# Allegro board EmberBase.brd
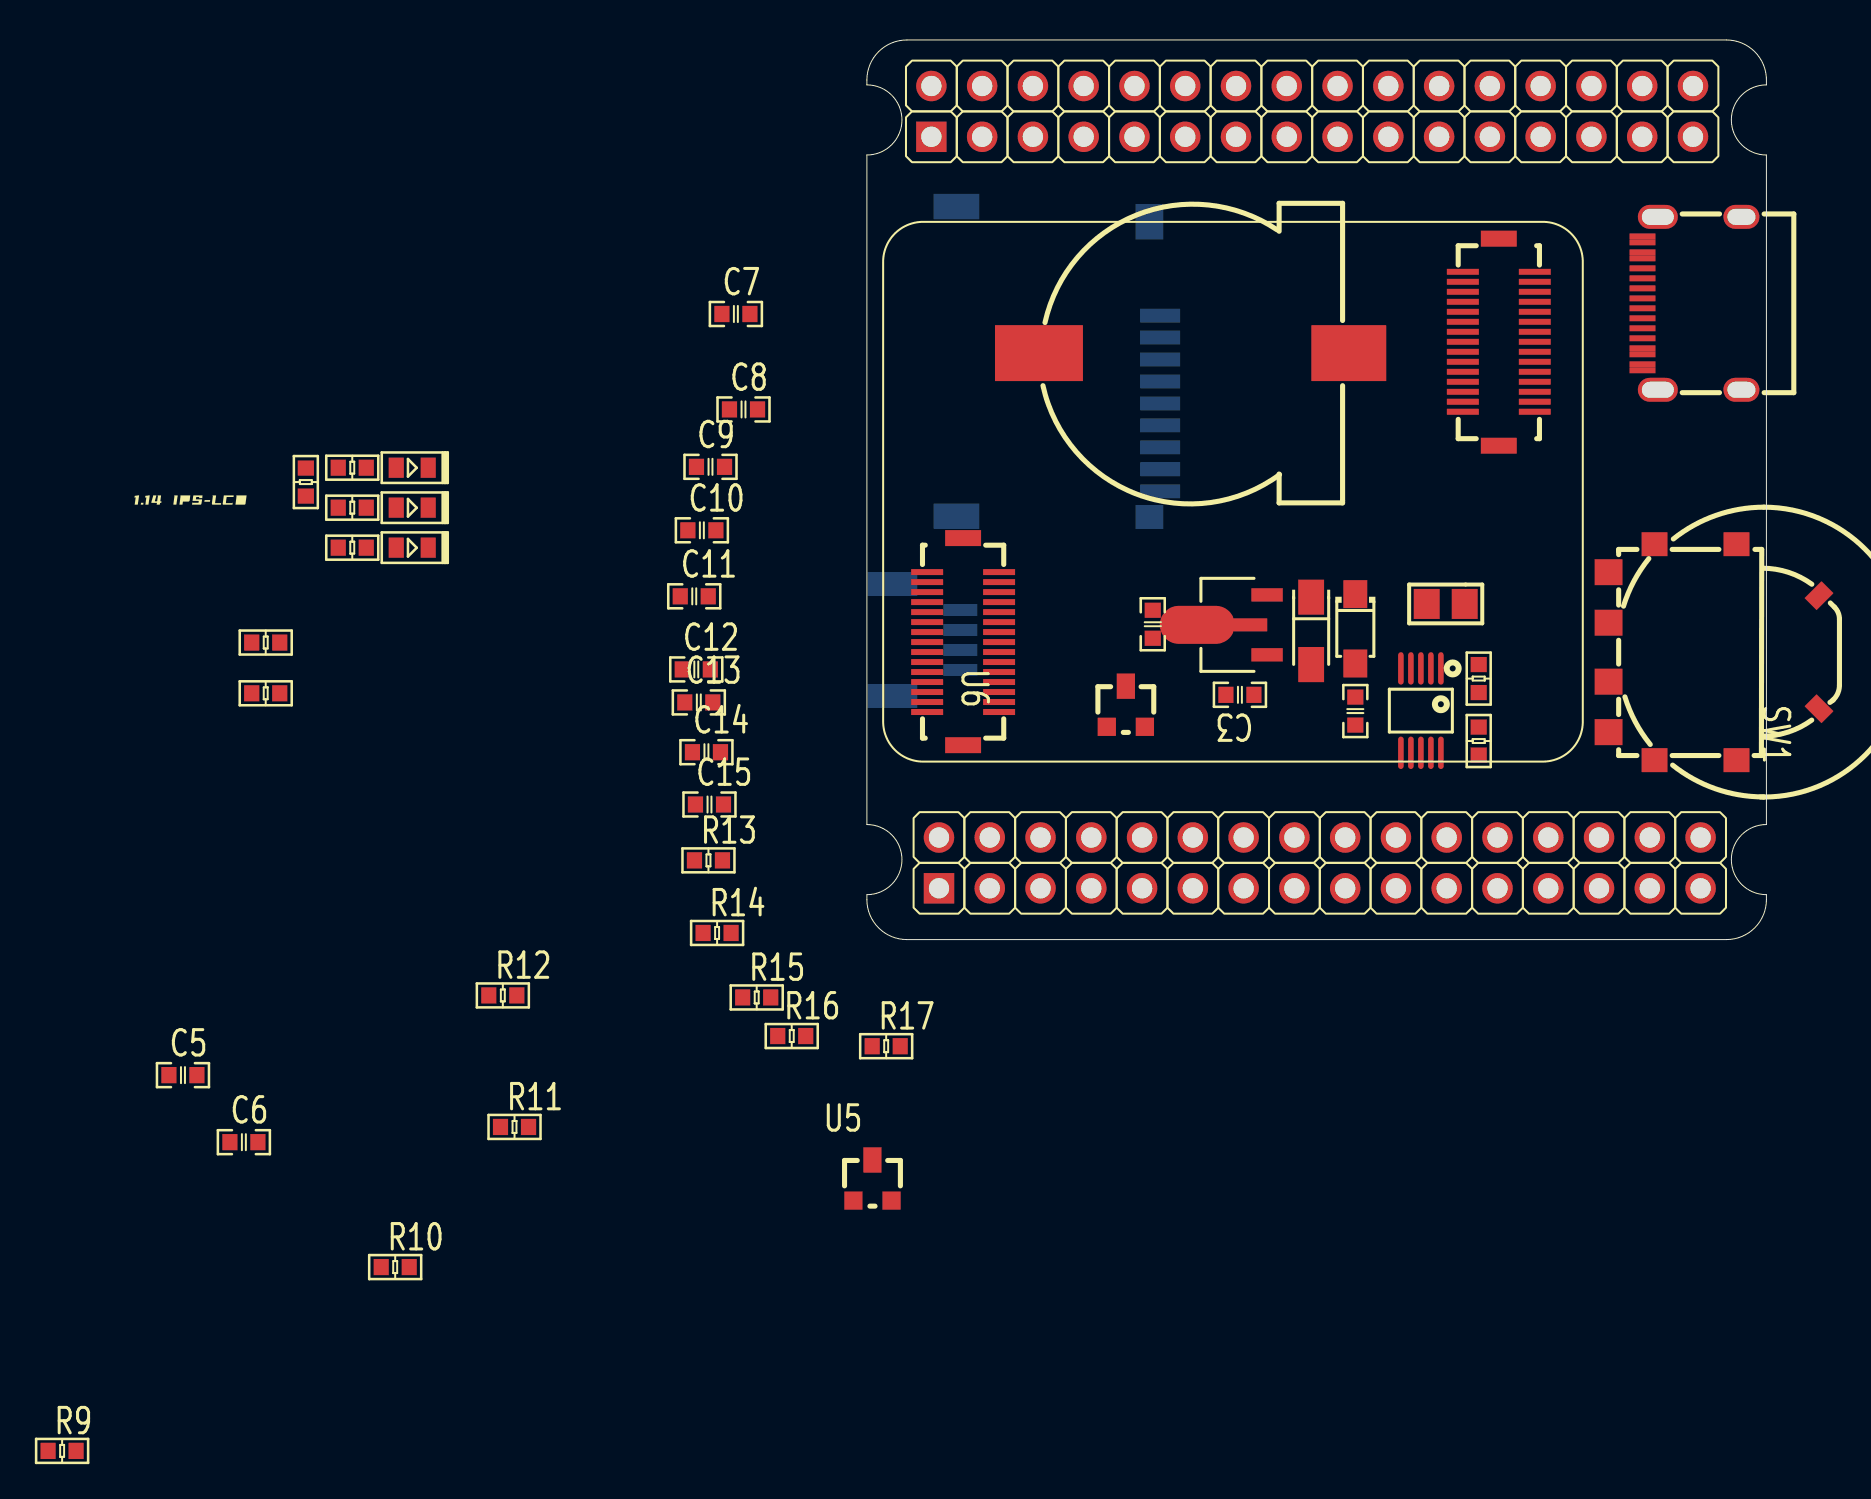
[diagram p0: board, top side]
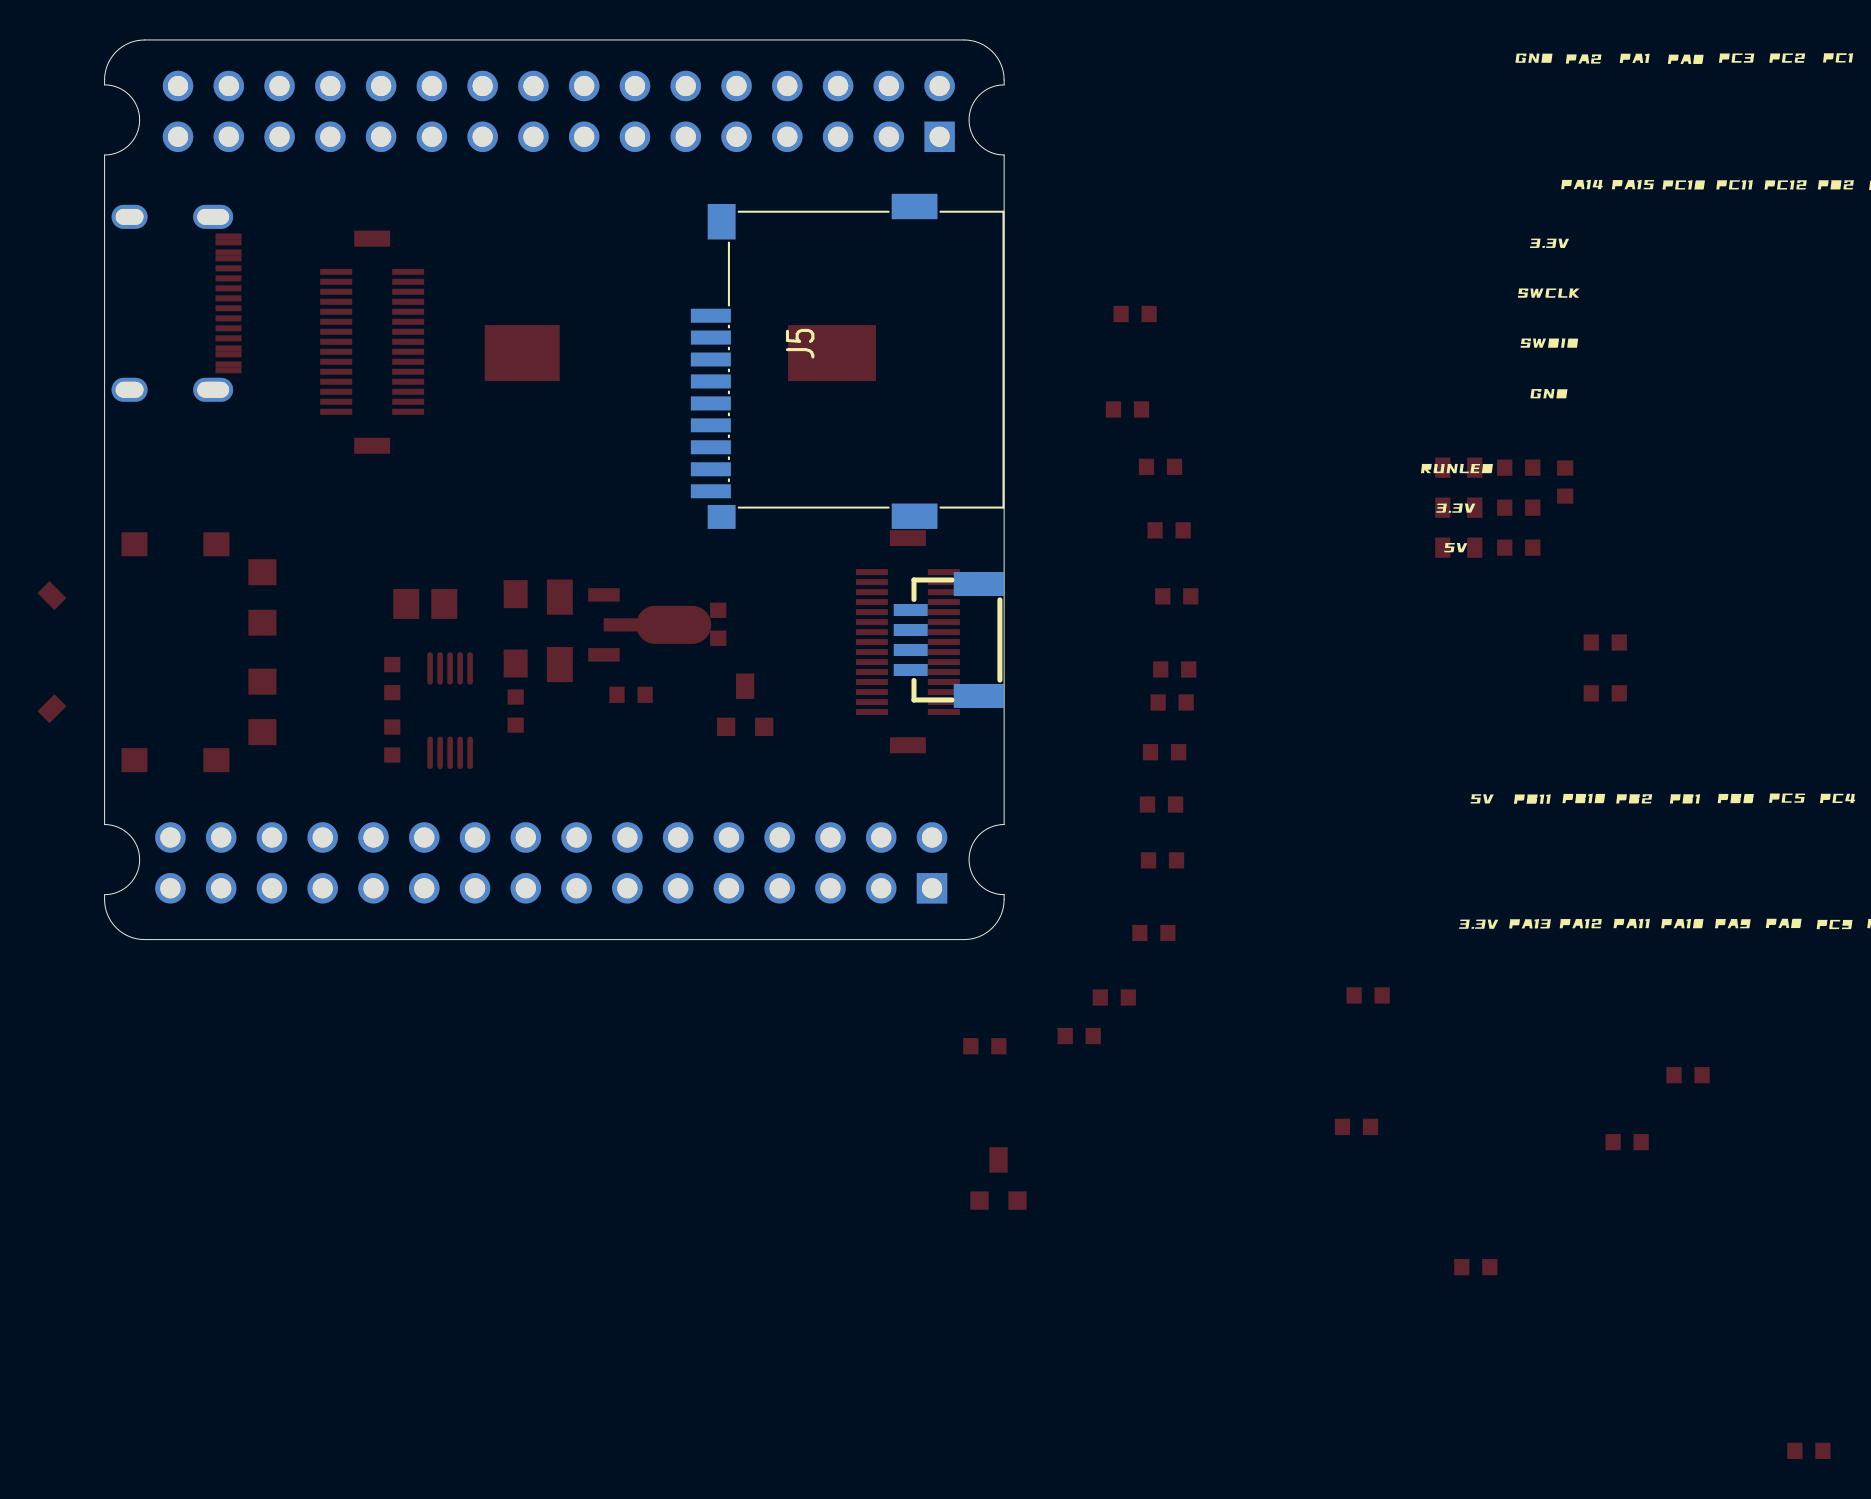
[diagram p1: board, bottom side, seen from below]

Outline 45 x 45 mm; copper layers: TOP, GND, PWR, BOTTOM. Coordinates in mm from the lower left corner of the outline.
Outline path: 0,43 arc(0.59,44.41) 2,45 43,45 arc(44.41,44.41) 45,43 45,42.75 arc(43.25,41) 45,39.25 45,5.75 arc(43.25,4) 45,2.25 45,2 arc(44.41,0.59) 43,0 2,0 arc(0.59,0.59) 0,2 0,2.25 arc(1.75,4) 0,5.75 0,39.25 arc(1.75,41) 0,42.75 0,43

## Design rules (mm)
constraint set DEFAULT: min track width 0.152

## Placement (name value [footprint] x y rotation side)
BT1  CR1220  [CR1220_SMD]  16.36 29.34 0 top
C1  10uF  [C0603]  14.3 15.77 90 top
C2  10uF  [CASE-A-3216]  22.23 15.44 270 top
C3  10uF  [C0603]  18.66 12.24 180 top
C4  0.1uF  [C0603]  24.43 11.43 90 top
C5  10uF  [C0603]  -34.21 -6.78 0 top
C6  10uF  [C0603]  -31.17 -10.13 0 top
C7  0.1uF  [C0603]  -6.55 31.29 0 top
C8  10uF  [C0603]  -6.17 26.52 0 top
C9  0.1uF  [C0603]  -7.82 23.65 0 top
C10  10uF  [C0603]  -8.26 20.47 0 top
C11  0.1uF  [C0603]  -8.64 17.17 0 top
C12  10uF  [C0603]  -8.53 13.51 0 top
C13  0.1uF  [C0603]  -8.41 11.86 0 top
C14  10uF  [C0603]  -8.03 9.37 0 top
C15  0.1uF  [C0603]  -7.87 6.76 0 top
D1  LED  [LED0603]  -22.74 19.6 0 top
D2  LED  [LED0603]  -22.74 21.6 0 top
D3  LED  [LED0603]  -22.74 23.6 0 top
D4  BAT54C,215  [SOT-23]  12.95 11.63 0 top
F1  BSMD0805-100-6V  [F0805]  28.96 16.79 180 top
J1  Type-C 12P  [TYPE-C-12P]  41.27 31.83 90 top
J2  2.54 2X16P  [CON_254-2X16P]  22.66 3.84 0 top
J3  2.54 2X16P  [CON_254-2X16P]  22.28 41.43 0 top
J5  MicroSD  [TFCARD_SMD]  9.58 28.91 90 bottom
J6  SH1.0 4P SMD  [CON_1-4P-SMD]  2.97 14.99 90 bottom
NOREF  -  []  -49.24 5.13 0 top
NOREF#2  -  []  -24.48 27.31 0 top
NOREF#3  -  []  -49.23 2.6 0 top
NOREF#4  -  []  -22.67 21.59 0 top
NOREF#5  -  []  -33.83 21.99 0 top
NOREF#6  -  []  -56.85 42.13 0 top
NOREF#7  -  []  -51.75 39.58 0 top
NOREF#8  -  []  -59.38 39.58 0 top
NOREF#9  -  []  -33.98 5.14 0 top
NOREF#10  -  []  -51.76 42.12 0 top
NOREF#11  -  []  -24.45 32.35 0 top
NOREF#12  -  []  -59.37 42.13 0 top
NOREF#13  -  []  -28.91 2.6 0 top
NOREF#14  -  []  -41.58 42.13 0 top
NOREF#15  -  []  -51.75 5.12 0 top
NOREF#16  -  []  -28.91 5.16 0 top
NOREF#17  -  []  -26.33 5.13 0 top
NOREF#18  -  []  -56.85 2.61 0 top
NOREF#19  -  []  -56.83 5.11 0 top
NOREF#20  -  []  -41.6 39.59 0 top
NOREF#21  -  []  -44.14 2.61 0 top
NOREF#22  -  []  -46.66 42.13 0 top
NOREF#23  -  []  -54.29 42.12 0 top
NOREF#24  -  []  -46.69 5.1 0 top
NOREF#25  -  []  -23.84 5.14 0 top
NOREF#26  -  []  -36.53 39.59 0 top
NOREF#27  -  []  -39.06 2.62 0 top
NOREF#28  -  []  -26.37 42.11 0 top
NOREF#29  -  []  -41.61 2.56 0 top
NOREF#30  -  []  -26.37 2.6 0 top
NOREF#31  -  []  -36.51 5.16 0 top
NOREF#32  -  []  -49.17 39.58 0 top
NOREF#33  -  []  -46.69 39.6 0 top
NOREF#34  -  []  -49.22 42.11 0 top
NOREF#35  -  []  -39.08 5.18 0 top
NOREF#36  -  []  -46.69 2.63 0 top
NOREF#37  -  []  -61.94 39.64 0 top
NOREF#38  -  []  -44.13 42.13 0 top
NOREF#39  -  []  -33.98 39.58 0 top
NOREF#40  -  []  -33.96 42.06 0 top
NOREF#41  -  []  -39.04 42.12 0 top
NOREF#42  -  []  -31.43 5.14 0 top
NOREF#43  -  []  -31.46 2.61 0 top
NOREF#44  -  []  -36.51 42.12 0 top
NOREF#45  -  []  -24.52 34.84 0 top
NOREF#46  -  []  -24.48 29.84 0 top
NOREF#47  -  []  -33.99 2.6 0 top
NOREF#48  -  []  -28.89 39.6 0 top
NOREF#49  -  []  -23.82 2.58 0 top
NOREF#50  -  []  -22.69 23.57 0 top
NOREF#51  -  []  -44.15 39.56 0 top
NOREF#52  -  []  -31.44 39.6 0 top
NOREF#53  -  []  -54.29 5.1 0 top
NOREF#54  -  []  -31.41 42.11 0 top
NOREF#55  -  []  -28.85 42.07 0 top
NOREF#56  -  []  -41.6 5.16 0 top
NOREF#57  -  []  -56.85 39.58 0 top
NOREF#58  -  []  -51.78 2.59 0 top
NOREF#59  -  []  -22.67 19.61 0 top
NOREF#60  -  []  -61.91 42.11 0 top
NOREF#61  -  []  -54.31 2.61 0 top
NOREF#62  -  []  -39.08 39.58 0 top
NOREF#63  -  []  -54.3 39.59 0 top
NOREF#64  -  []  -44.16 5.12 0 top
NOREF#65  -  []  -36.52 2.6 0 top
R1  5.1K  [R0603]  -30.07 12.32 0 top
R2  5.1K  [R0603]  -30.07 14.86 0 top
R3  1K  [R0603]  30.61 13.06 90 top
R4  3K  [R0603]  -25.74 19.6 180 top
R5  3K  [R0603]  -25.74 21.6 180 top
R6  470R  [R0603]  -25.74 23.6 180 top
R7  1K(NC)  [R0603]  30.61 9.93 270 top
R8  0R  [R0603]  -28.07 22.89 90 top
R9  10K  [R0603]  -40.26 -25.58 0 top
R10  10K  [R0603]  -23.6 -16.38 0 top
R11  10K  [R0603]  -17.63 -9.37 0 top
R12  100R  [R0603]  -18.21 -2.79 0 top
R13  10K  [R0603]  -7.92 3.96 0 top
R14  10K  [R0603]  -7.49 0.33 0 top
R15  10K  [R0603]  -5.51 -2.9 0 top
R16  10K  [R0603]  -3.76 -4.83 0 top
R17  10K  [R0603]  0.97 -5.33 0 top
SW1  SIQ-02FVS3  [SW_SIQ]  42.37 14.38 270 top
U1  AMS1117  [SOT-89-3]  18.66 15.74 0 top
U3  CH340X  [MSOP-10]  27.71 11.45 180 top
U5  REF3033AIDBZR  [SOT-23]  0.28 -12.06 0 top
U6  Ember_V1.2  [EMBERV1_1]  18.31 22.4 0 top
Z1  SMF7.0A  [SOD-123FL]  24.43 15.54 270 top

## Library data of the parts
BT1 = BATTERY
C1 C3-C15 = C
C2 = CAP
D1-D3 = LED
D4 = DIODE_Dual1
F1 = FUSE
J1 = TYPE-C_12P_SMD
J2 J3 = CON_2X16
J5 = MicroSD
J6 = CON_6: Tolerance: .TOL; User Part Number: E09J074
R1-R17 = R
SW1 = SW_SIQ
U1 = AMS1117_SOT89
U3 = CH340X
U5 = REF3033AIDBZR
U6 = Ember_V1.2
Z1 = TVSA

## Footprints (pads in the part's own frame, mm; a bottom-side part is the same pattern mirrored in y, then rotated)
C0603
  rect 0.762x0.813 smd: 1(-0.701,0) 2(0.701,0)
CASE-A-3216
  rect 1.758x1.295 smd: 1(-1.687,0) 2(1.687,0)
CON_1-4P-SMD
  rect 0.6x1.7 smd: 1(-1.5,1.7) 2(-0.5,1.7) 3(0.5,1.7) 4(1.5,1.7)
  rect 1.2x2.5 smd: 5(2.8,-1.7) 6(-2.8,-1.7)
CON_254-2X16P
  rect 1.524x1.524 hole 1.016: 1(-19.05,-1.27)
  round 1.524 hole 1.016: 2(-19.05,1.27) 3(-16.51,-1.27) 4(-16.51,1.27) 5(-13.97,-1.27) 6(-13.97,1.27) 7(-11.43,-1.27) 8(-11.43,1.27) 9(-8.89,-1.27) 10(-8.89,1.27) 11(-6.35,-1.27) 12(-6.35,1.27) 13(-3.81,-1.27) 14(-3.81,1.27) 15(-1.27,-1.27) 16(-1.27,1.27) 17(1.27,-1.27) 18(1.27,1.27) 19(3.81,-1.27) 20(3.81,1.27) 21(6.35,-1.27) 22(6.35,1.27) 23(8.89,-1.27) 24(8.89,1.27) 25(11.43,-1.27) 26(11.43,1.27) 27(13.97,-1.27) 28(13.97,1.27) 29(16.51,-1.27) 30(16.51,1.27) 31(19.05,-1.27) 32(19.05,1.27)
CR1220_SMD
  rect 3.749x2.799 smd: 1(7.749,0)
  rect 4.399x2.799 smd: 2(-7.749,0)
EMBERV1_1
  rect 1.6x0.3 smd: 1(-15.3,-4.02) 2(-11.7,-4.02) 3(-15.3,-4.52) 4(-11.7,-4.52) 5(-15.3,-5.02) 6(-11.7,-5.02) 7(-15.3,-5.52) 8(-11.7,-5.52) 9(-15.3,-6.02) 10(-11.7,-6.02) 11(-15.3,-6.52) 12(-11.7,-6.52) 13(-15.3,-7.02) 14(-11.7,-7.02) 15(-15.3,-7.52) 16(-11.7,-7.52) 17(-15.3,-8.02) 18(-11.7,-8.02) 19(-15.3,-8.52) 20(-11.7,-8.52) 21(-15.3,-9.02) 22(-11.7,-9.02) 23(-15.3,-9.52) 24(-11.7,-9.52) 25(-15.3,-10.02) 26(-11.7,-10.02) 27(-15.3,-10.52) 28(-11.7,-10.52) 29(-15.3,-11.02) 30(-11.7,-11.02) 31(15.1,4) 32(11.5,4) 33(15.1,4.5) 34(11.5,4.5) 35(15.1,5) 36(11.5,5) 37(15.1,5.5) 38(11.5,5.5) 39(15.1,6) 40(11.5,6) 41(15.1,6.5) 42(11.5,6.5) 43(15.1,7) 44(11.5,7) 45(15.1,7.5) 46(11.5,7.5) 47(15.1,8) 48(11.5,8) 49(15.1,8.5) 50(11.5,8.5) 51(15.1,9) 52(11.5,9) 53(15.1,9.5) 54(11.5,9.5) 55(15.1,10) 56(11.5,10) 57(15.1,10.5) 58(11.5,10.5) 59(15.1,11) 60(11.5,11)
  rect 1.801x0.8 smd: 61(-13.5,-2.32) 62(-13.5,-12.68) 63(13.3,12.66) 64(13.3,2.3)
F0805
  rect 1.301x1.501 smd: 1(-0.95,0) 2(0.95,0)
LED0603
  rect 0.762x1.016 smd: 1(-0.8,0) 2(0.8,0)
MSOP-10
  oval 0.279x1.62 smd: 1(-1.001,-2.111) 2(-0.5,-2.111) 3(0,-2.111) 4(0.5,-2.111) 5(1.001,-2.111) 6(1.001,2.111) 7(0.5,2.111) 8(0,2.111) 9(-0.5,2.111) 10(-1.001,2.111)
R0603
  rect 0.762x0.813 smd: 1(-0.701,0) 2(0.701,0)
SOD-123FL
  rect 1.399x1.199 smd: 1(1.735,0) 2(-1.735,0)
SOT-23
  rect 0.914x0.914 smd: 1(-0.953,-0.991) 2(0.953,-0.991)
  rect 0.914x1.27 smd: 3(0,1.041)
SOT-89-3
  rect 1.575x0.673 smd: 1(1.356,-1.501) 3(1.356,1.499)
  custom 5.375x1.9 smd: 2(-1.321,0)
SW_SIQ
  rect 1.2x1.3 smd: 1(5.4,-2.964) 2(5.4,1.136) 5(-5.4,1.136) 6(-5.4,-2.964)
  rect 0.85x1.2 smd rot 135: 3(2.828,5.264)
  rect 0.85x1.2 smd rot 45: 4(-2.828,5.264)
  rect 1.3x1.4 smd: A(-4,-5.264) B(4,-5.264) C(1.475,-5.264) S(-1.475,-5.264)
TFCARD_SMD
  rect 0.7x2 smd: 1(2.303,5.095) 2(1.21,5.093) 3(0.113,5.095) 4(-0.986,5.095) 5(-2.085,5.095) 6(-3.183,5.095) 7(-4.28,5.095) 8(-5.378,5.095) 9(-6.482,5.095)
  rect 1.2x1.397 smd: 10(-7.765,4.557)
  rect 1.27x2.286 smd: 11(-7.729,-5.095) 12(7.765,-5.095)
  rect 1.778x1.397 smd: 13(7.003,4.557)
TYPE-C-12P
  rect 0.3x1.301 smd: A1(-3.35,2.474) A4(-2.55,2.474) A5(-1.25,2.474) A6(-0.249,2.474) A7(0.249,2.474) A8(1.25,2.474) A9(2.55,2.474) A12(3.35,2.474) B1(3.05,2.474) B4(2.25,2.474) B5(1.75,2.474) B6(0.749,2.474) B7(-0.749,2.474) B8(-1.75,2.474) B9(-2.25,2.474) B12(-3.05,2.474)
  oval 1.199x1.999 hole 0.8x1.6: G1(-4.326,1.707) G2(4.326,1.707)
  oval 1.199x1.801 hole 0.8x1.399: G3(-4.326,-2.474) G4(4.326,-2.474)

## Nets
5V: C1.2 C5.2 F1.2 J2.2 J3.2 R4.2 U1.3 U5.1 U6.2 U6.32 Z1.2
GND: BT1.2 C1.1 C2.2 C3.1 C4.2 C5.1 C6.1 C7.1 C8.1 C9.1 C10.1 C11.1 C12.1 C13.1 C14.1 C15.1 D1.2(CATHODE) D2.2(CATHODE) J1.A1 J1.A12 J1.B1 J1.B12 J1.G1 J1.G2 J1.G3 J1.G4 J2.29 J2.30 J2.31 J2.32 J3.29 J3.30 J3.31 J3.32 J5.6 J5.10 J5.11 J5.12 J5.13 J6.4 R1.1 R2.1 SW1.1 SW1.2 SW1.3 SW1.4 SW1.5 SW1.6 SW1.C U1.1 U3.3 U5.3 U6.29 U6.30 U6.59 U6.60 Z1.1
VBAT: D4.3 J2.7 U6.7
VCC3V3: C2.1 C3.2 C4.1 C7.2 C8.2 C9.2 C12.2 C13.2 C14.2 C15.2 D4.2 J3.1 J5.4(VDD) J6.1 R5.2 R6.2 R8.1 R9.1 R10.1 R11.1 R13.1 R14.1 R15.1 R16.1 R17.1 U1.2(VOUT) U3.7(VCC) U3.10 U6.31(VCC3V3)
BOOT0: J2.4 R7.2 U3.6 U6.4
D+: J1.A6 J1.B6 U3.1
D-: J1.A7 J1.B7 U3.2
NRST: J2.15 R3.2 U6.15
PA0: J2.25 U6.25
PA1: J2.27 U6.27
PA2: J3.28 U6.58
PA3: J3.26 U6.56
PA4: J3.24 U6.54
PA5: J3.22 U6.52
PA6: J3.20 U6.50
PA7: J3.18 U6.48
PA8: J3.11 U6.41
PA9: J3.9 U3.9 U6.39
PA10: J3.7 U3.8 U6.37
PA11: J3.5 U6.35
PA12: J3.3 U6.33
PA13: J2.28 J6.3 U6.28
PA14: J2.26 J6.2 U6.26
PA15: J2.24 U6.24
PB0: J3.12 U6.42
PB1: J3.10 U6.40
PB2: J3.8 U6.38
PB3: J2.14 U6.14
PB4: J2.12 U6.12
PB5: J2.10 U6.10
PB6: J2.8 U6.8
PB7: J2.6 U6.6
PB8: J2.3 U6.3
PB9: J2.5 U6.5
PB10: J3.6 U6.36
PB11: J3.4 U6.34
PB12: J3.27 U6.57
PB13: J3.25 R9.2 SW1.S(S(PUSH)) U6.55
PB14: D3.2(CATHODE) J3.23 U6.53
PB15: J3.21 R12.2 U6.51
PC0: J2.17 U6.17
PC1: J2.19 U6.19
PC2: J2.21 U6.21
PC3: J2.23 U6.23
PC4: J3.16 U6.46
PC5: J3.14 U6.44
PC6: J3.19 R11.2 SW1.A U6.49
PC7: J3.17 R10.2 SW1.B U6.47
PC8: J3.15 J5.7 R14.2 U6.45
PC9: J3.13 J5.8 R13.2 U6.43
PC10: J2.22 J5.1 R16.2 U6.22
PC11: J2.20 J5.2 R17.2 U6.20
PC12: J2.18 U6.18
PC13: J2.9 U6.9
PC14: J2.11 U6.11
PC15: J2.13 U6.13
PD2: J2.16 J5.3 R15.2 U6.16
VREF: C6.2 C10.2 C11.2 J2.1 R8.2 U5.2(VOUT) U6.1
N695529: R3.1 U3.4
N695551: R7.1 U3.5
N701179: F1.1 J1.A4 J1.A9 J1.B4 J1.B9(VBUS4)
N701299: J1.A5 R1.2
N701377: J1.B5 R2.2
N703342: D1.1 R4.1
N703346: D2.1 R5.1
N703350: D3.1 R6.1
N796577: BT1.1 D4.1
N800242: J5.5 R12.1

Pads without a net: J1 A8 B8; J5 9; J6 5 6; U6 61 62 63 64
